# Altium PCB sim part 2.PcbDoc
Units mm, origin at the board's own origin, x right, y up, seen from the top; angles counter-clockwise.
Board outline 26 x 7 mm, 2 copper layers (Top Layer, Bottom Layer); 4 components, 5 nets, 16 pads, 0 vias.
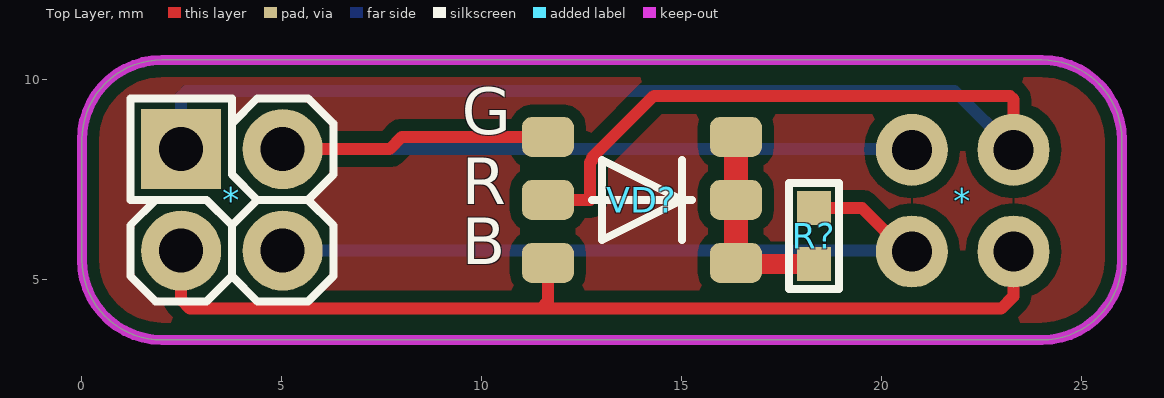
[diagram p0: Top Layer view]
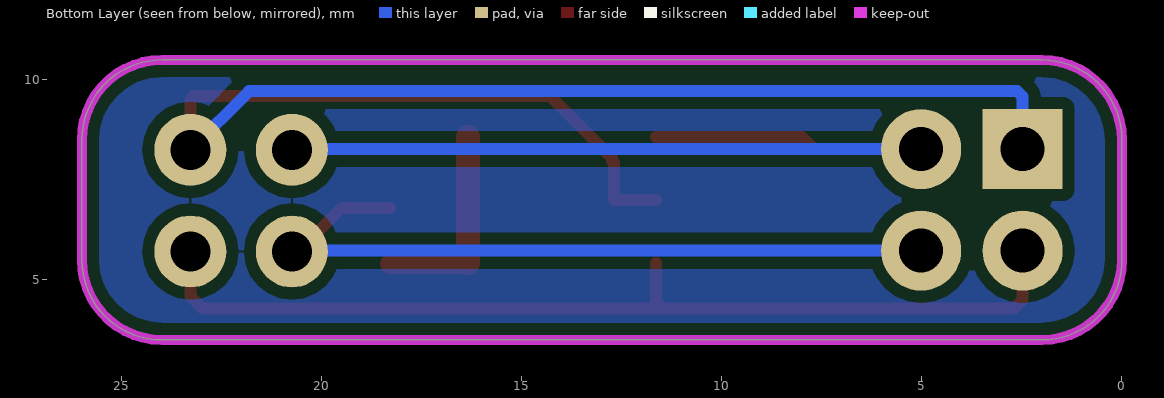
[diagram p1: Bottom Layer view, seen from below]
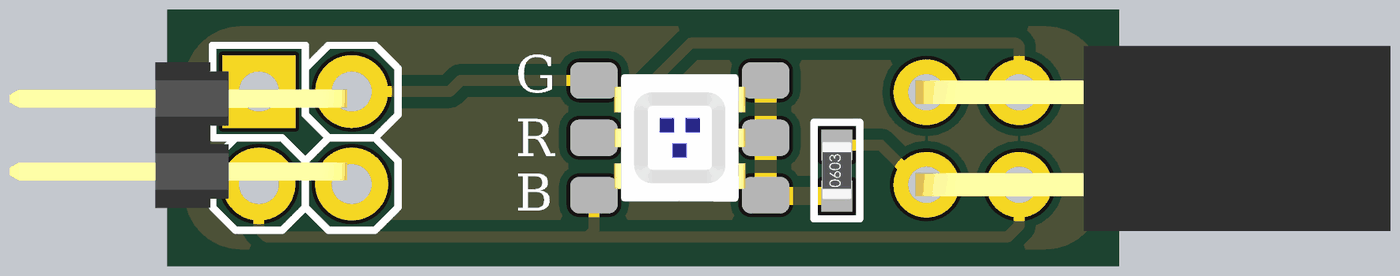
[diagram p2: 3D render of the assembled board from above, using the file's embedded part models]

## Layer stack, top to bottom
Top Solder: solder mask 0.0102, Solder Resist, Dk 3.5
Top Layer: signal copper 0.0356
Dielectric 1: dielectric 0.32, FR-4, Dk 4.8
Bottom Layer: signal copper 0.0356
Bottom Solder: solder mask 0.0102, Solder Resist, Dk 3.5

## Board outline
2,3.5 cw(c2,5.5) 0,5.5 0,8.5 cw(c2,8.5) 2,10.5 24,10.5 cw(c24,8.5) 26,8.5 26,5.5 cw(c24,5.5) 24,3.5

## Design rules (kind name [scope] priority, off if disabled: settings)
Clearance [All] p1: gap=0.3 ignorepadtopadclearanceinfootprint=FALSE
PolygonConnect [All] p1: thpad.connectstyle=Relief thpad.reliefconductorwidth=0.5 thpad.reliefentries=4 thpad.polygonreliefangle="90 Angle" thpad.airgapwidth=0.4 smdpad.connectstyle=Relief smdpad.reliefconductorwidth=0.5 smdpad.reliefentries=4 smdpad.polygonreliefangle="90 Angle" smdpad.airgapwidth=0.5 via.connectstyle=Relief via.reliefconductorwidth=0.254 via.reliefentries=4 via.polygonreliefangle="90 Angle" via.airgapwidth=0.254
RoutingVias [All] p1: holewidth=0.711 width=1.27 viastyle="Through Hole" minholewidth=0.711 minwidth=1.27 maxholewidth=0.711 maxwidth=1.27
SolderMaskExpansion [All] p1: expansion=0.102
Width [All] p1: maxlimit=2 minlimit=0.254 preferedwidth=0.75
30 further rules are at their usual default settings.

## Classes and differential pairs
component class "sim part 2": * R?

## Components (designator, comment, footprint, x,y, rotation, side; value= is the part's Value field where it differs from the comment)
* "PBD-4" PBD-4-RIGHT 22.02,5.71 r90 top
* "PBD-4" PLD-4-R 3.75,7 r270 top
R? "Resistor film, 100R, ±5%, 0603, 0.1W, -55...+125°C" "RES: 0603" 18.3,6.1 r90 top value=100R
VD? "VD?" RGB 14,7 r0 top

## Footprints (in the part's own frame and the unit in brackets; to place one, negate y for a bottom-side part, rotate by r counter-clockwise, add the part's x,y. Pads: shape width x height; smd on the part's side, far side on the other; paste and mask are expansions set on the pad)
PBD-4-RIGHT [mm]
  round 1.8 hole 1: 1(0,1.27) 2(2.54,1.27) 3(0,-1.27) 4(2.54,-1.27)
  body extent -1.27,-11.43 3.81,1.57, height 5
PLD-4-R [mm]
  rect 2x2 hole 1.1: 1(-1.27,-1.27)
  round 2 hole 1.1: 2(-1.27,1.27) 3(1.27,-1.27) 4(1.27,1.27)
  silkscreen extent -2.54,-2.54 2.54,2.54, body extent -2.07,-8.1 1.92,1.15, height 4
"RES: 0603" [mm]
  rect 0.85x0.85 smd: 1(-0.7,0) 2(0.7,0)
  silkscreen extent -1.33,-0.63 1.33,0.63, body extent -0.8,-0.4 0.8,0.4, height 0.44
RGB [mm]
  rrect50% 1.3x1 smd: 1(2.35,1.575) 2(2.35,0) 3(2.35,-1.575) 4(-2.35,1.575) 5(-2.35,0) 6(-2.35,-1.575)
  silkscreen extent -1.25,-1 1.25,1, body extent -1.8,-1.75 1.8,1.75, height 2.01

## Part data
R?: library part Resistor_0603, Manufacturer=Yageo, Package=0603, PartNumber=RC0603JR-07100RL, Power=0.1W, Temperature=-55...+125°C, Tolerance=±5%, TypeResistor="Resistor film", HelpURL=https://www.digikey.com/product-detail/en/yageo/RC0603JR-07100RL/311-100GRCT-ND/729644, ValueManufacturerPartNumber="Resistor film, 100R, ±5%, 0603, 0.1W, -55...+125°C"
VD?: library part RGB

## Nets (pads, with @x,y where several pads share a name; then routed paths per layer and width w, separated by ;. In a path a pad name is that pad's centre, name@x,y a point inside that pad or via, vN(x,y) a via of type N, cw(c..) or ccw(c..) an arc to the next point about the centre after c; other vN are vias at no path point)
GND: *.1@20.75,5.71 *.4@5.02,5.73 R?.2 | length 18.6
  Top Layer w0.3: R?.2 19.5,6.8 20.59,5.71 *.1@20.75,5.71
  Bottom Layer w0.3: *.4@5.02,5.73 20.73,5.73 *.1@20.75,5.71
Net*_1: *.1@2.48,8.27 *.4@23.29,8.25 VD?.5 | length 37.4
  Top Layer w0.3: VD?.5 12.7,7 12.7,7.935 12.75,7.985 12.75,8.05 14.3,9.6 23.2,9.6 23.29,9.51 *.4@23.29,8.25
  Bottom Layer w0.3: *.1@2.48,8.27 2.48,9.58 2.62,9.72 21.82,9.72 *.4@23.29,8.25
Net*_2: *.2 VD?.4 | length 22.5
  Top Layer w0.3: *.2@5.02,8.27 7.695,8.27 8,8.575 VD?.4
  Bottom Layer w0.3: *.2@5.02,8.27 20.73,8.27 *.2@20.75,8.25
Net*_3: *.3 VD?.6 | length 24.6
  Top Layer w0.3: *.3@2.48,5.73 2.48,4.5 2.7,4.28 11.47,4.28 ; VD?.6 11.65,4.46 11.47,4.28 ; *.3@23.29,5.71 23.29,4.59 22.98,4.28 11.47,4.28
NetR?_1: R?.1 VD?.1 VD?.2 VD?.3 | length 5.1
  Top Layer w0.5: VD?.3 16.375,5.4 R?.1
  Top Layer w0.6: VD?.3 VD?.2 VD?.1

## Polygon pours and split planes (outlines as drawn)
no net on Top Layer "Top Layer-No Net" (solid, pour order 8): 2,3.5 cw(c2,5.5) 0,5.5 0,8.5 cw(c2,8.5) 2,10.5 24,10.5 cw(c24,8.5) 26,8.5 26,5.5 cw(c24,5.5) 24,3.5
no net on Bottom Layer "Top Layer-No Net1" (solid, pour order 9): 2,3.5 cw(c2,5.5) 0,5.5 0,8.5 cw(c2,8.5) 2,10.5 24,10.5 cw(c24,8.5) 26,8.5 26,5.5 cw(c24,5.5) 24,3.5

## Keep-outs
Keep-Out Layer:
  the board outline again, w0.254

## Text inside footprints (layer, text, board x,y; h text height)
VD?: Top Overlay "B" at 9.5,5 h2; Top Overlay "R" at 9.5,6.5 h2; Top Overlay "G" at 9.5,8.25 h2